# Altium PCB PCB_TIMER_2025-06-27.pcbdoc
Units mm, origin at the board's own origin, x right, y up, seen from the top; angles counter-clockwise.
Board outline 99.44 x 77.72 mm, 2 copper layers (Top Layer, Bottom Layer); 14 components, 21 nets, 56 pads, 4 vias.
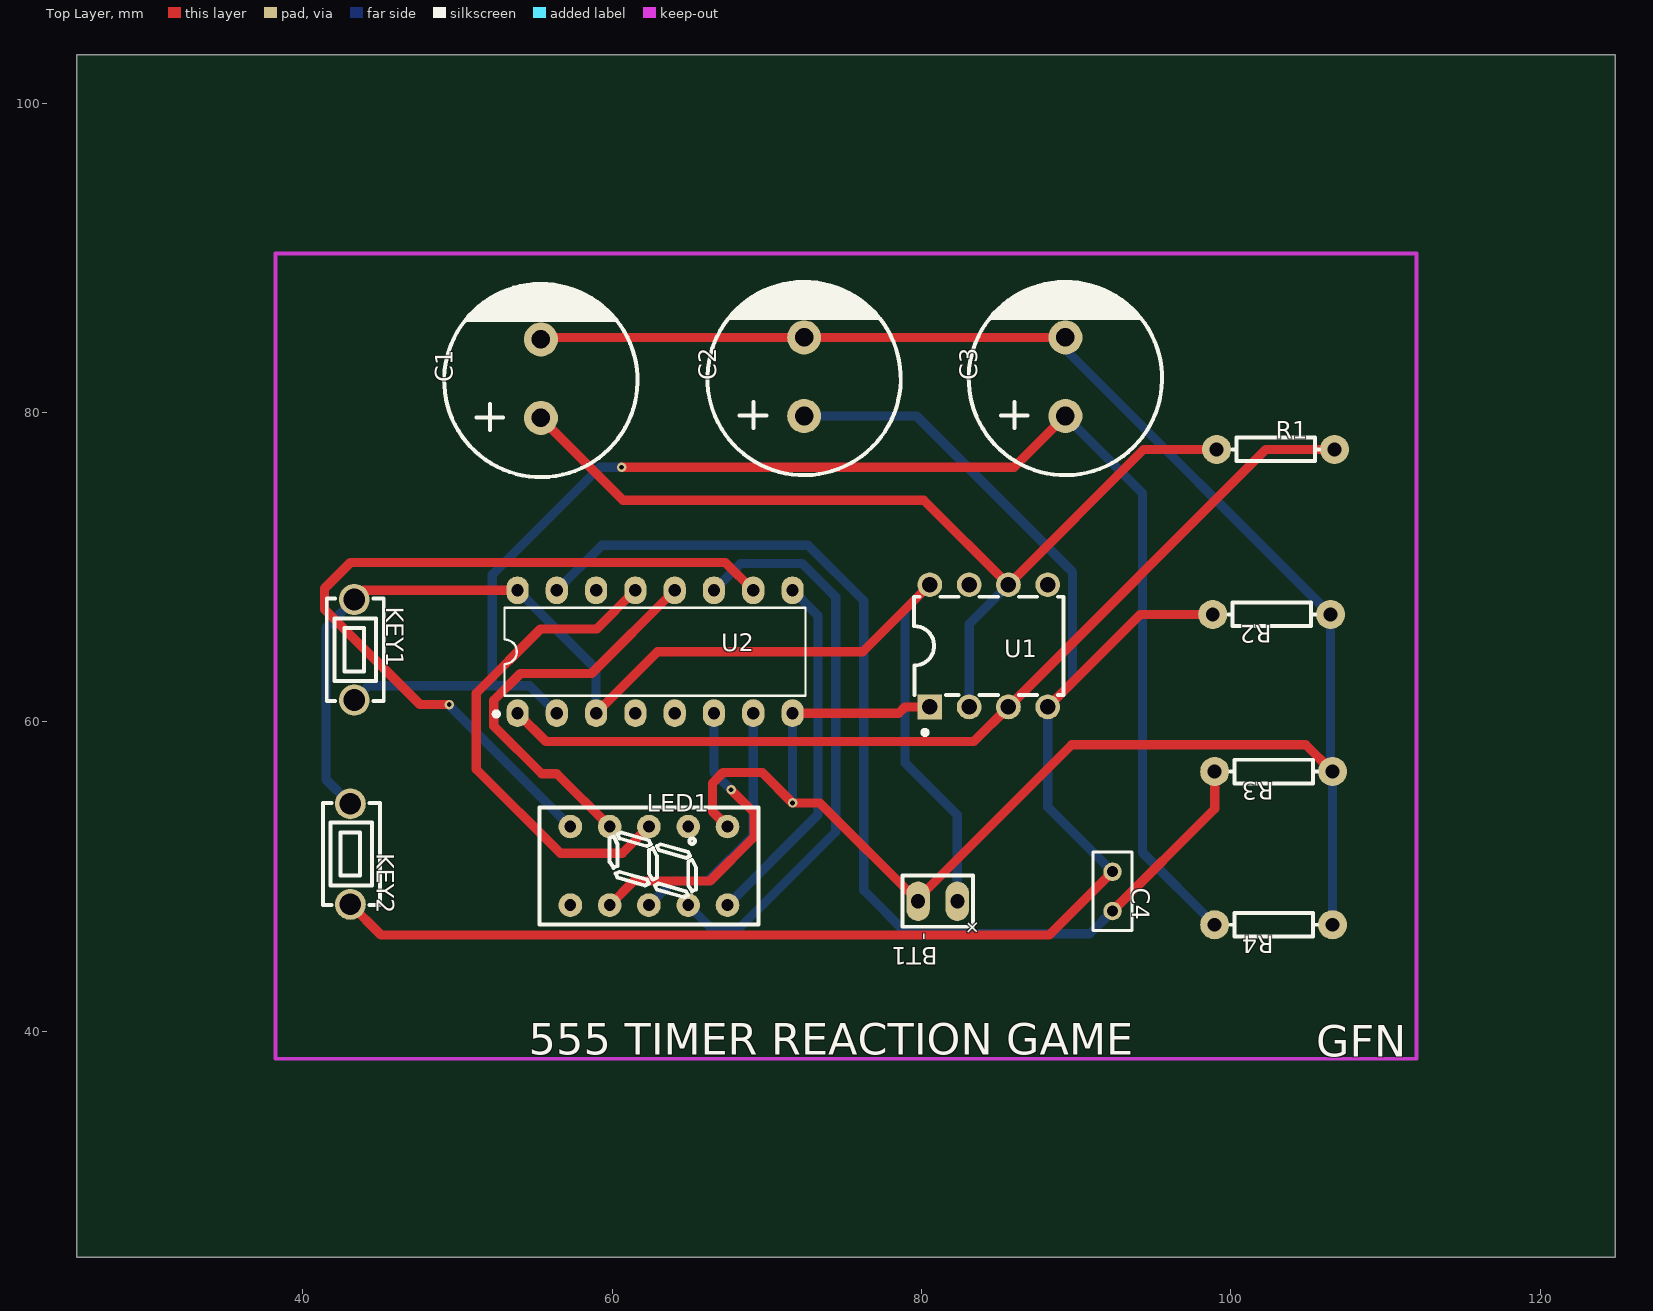
[diagram p0: Top Layer view]
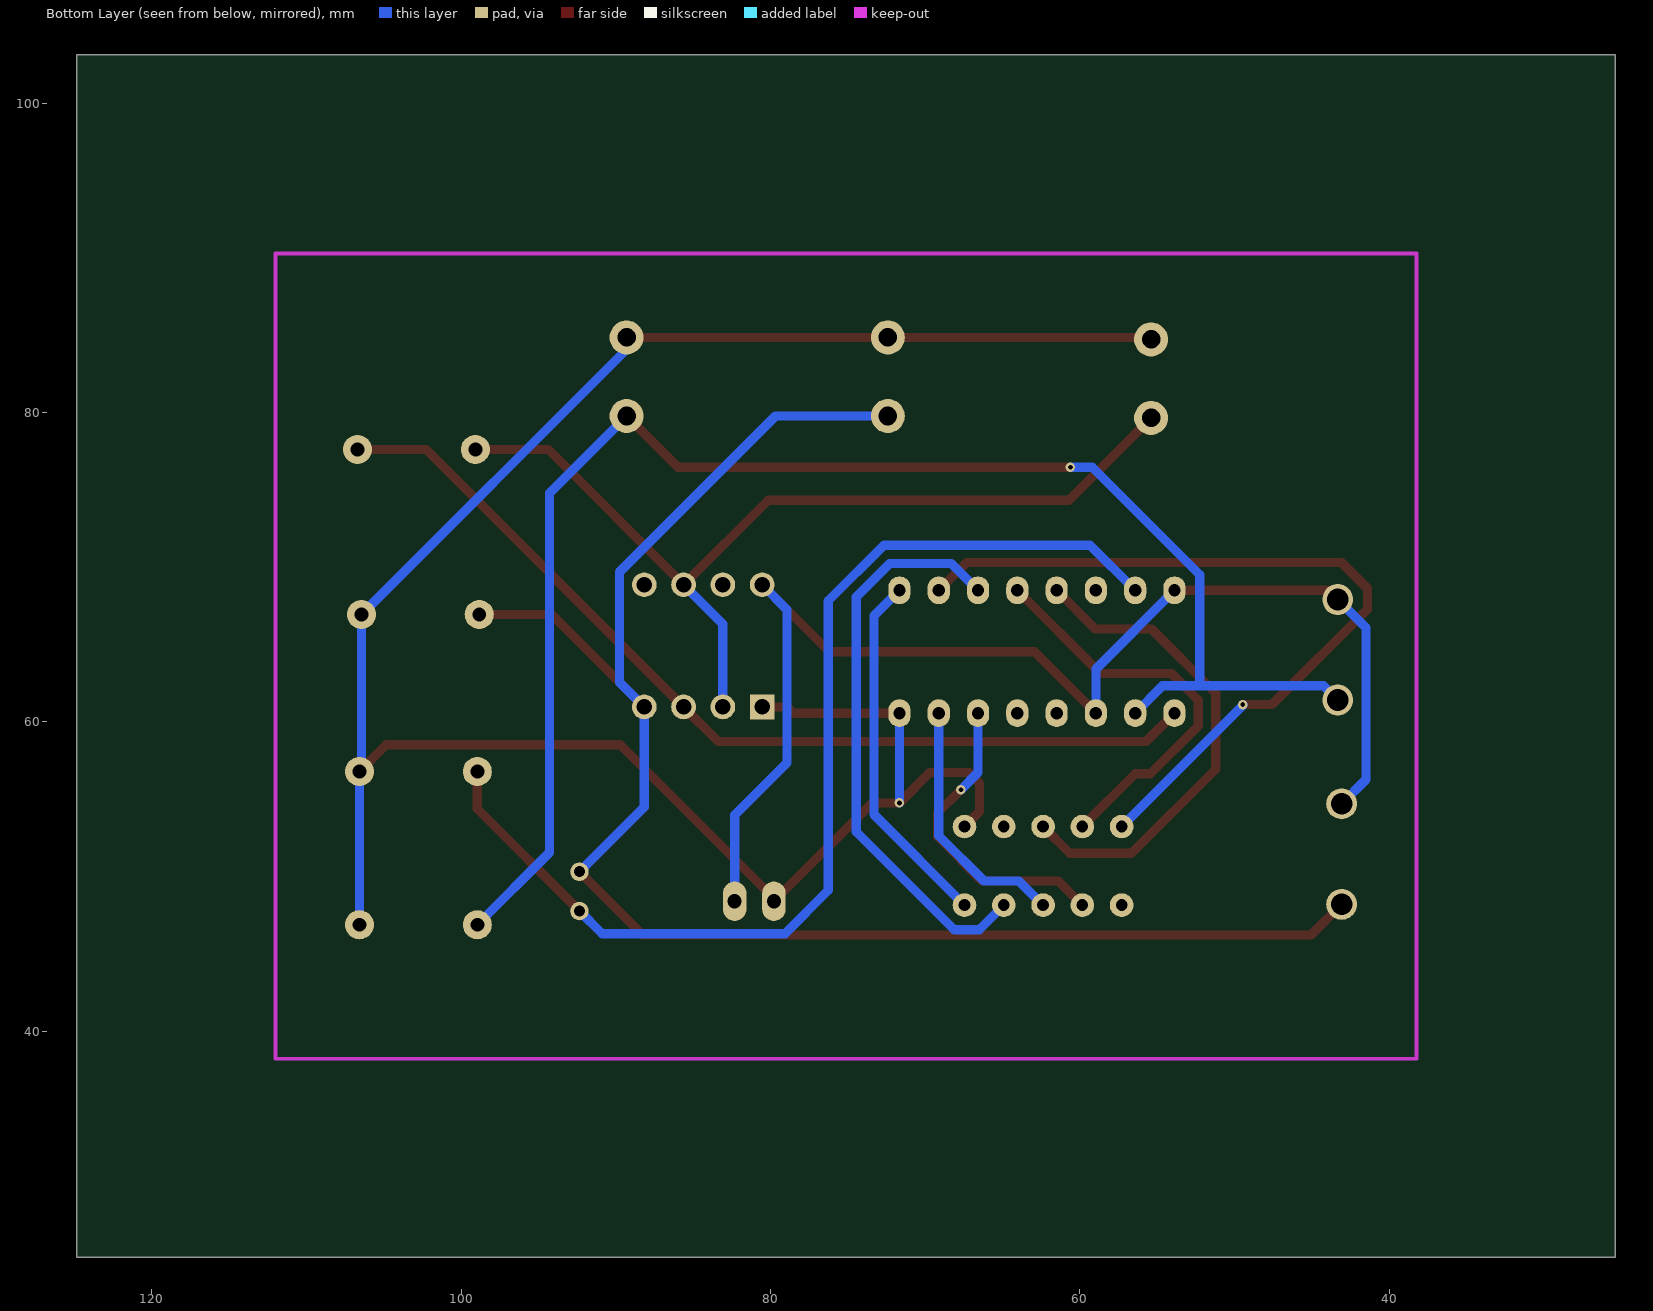
[diagram p1: Bottom Layer view, seen from below]

## Layer stack, top to bottom
Top Layer: signal copper (thickness not stored)
Dielectric: dielectric 0.32, FR-4, Dk 4.8
Bottom Layer: signal copper (thickness not stored)

## Board outline
124.841,25.4 25.4,25.4 25.4,103.124 124.841,103.124

## Components (designator, comment, footprint, x,y, rotation, side; value= is the part's Value field where it differs from the comment)
BT1 "9V" BAT-TH_2P-9VBATTERY 81.049,48.412 r180 top
C1 "1u" CAP-D12.5-F5.0 55.395,82.194 r90 top
C2 "1u" CAP-D12.5-F5.0 72.413,82.321 r90 top
C3 "1u" CAP-D12.5-F5.0 89.304,82.321 r90 top
C4 "1u" RAD-0.1 92.352,49.047 r270 top
KEY1 "K2-3.6×6.1_SMD" KEY-TH_L6.0-W3.5-P6.50 43.33,64.668 r270 top
KEY2 "K2-3.6×6.1_SMD" KEY-TH_L6.0-W3.5-P6.50 43.076,51.46 r270 top
LED1 "FJ3161BH" LED-SEG-TH_FJ3161BH 62.38,50.698 r0 top
R1 "1k" R_AXIAL-0.3 102.893,77.622 r0 top
R2 "1k" R_AXIAL-0.3 102.639,66.954 r180 top
R3 "1k" R_AXIAL-0.3 102.766,56.794 r180 top
R4 "1k" R_AXIAL-0.3 102.766,46.888 r180 top
U1 "NE555" PDIP-8_L9.6-W6.4-P2.54-LS7.9-BL-1 84.351,64.922 r0 top
U2 "CD4026" PDIP-16_L19.3-W6.4-P2.54-LS7.94-BL 62.774,64.541 r0 top

## Footprints (in the part's own frame and the unit in brackets; to place one, negate y for a bottom-side part, rotate by r counter-clockwise, add the part's x,y. Pads: shape width x height; smd on the part's side, far side on the other; paste and mask are expansions set on the pad)
BAT-TH_2P-9VBATTERY [mil]
  oval 60x100 hole 36 paste+0 mask+1.97: 1(-50,0) 2(50,0)
  silkscreen extent -90,-65 90,65
CAP-D12.5-F5.0 [mm]
  round 2.2 hole 1.2 paste+0 mask+0.051: 1(-2.54,0) 2(2.54,0)
  silkscreen extent -6.37,-6.25 6.17,6.25
KEY-TH_L6.0-W3.5-P6.50 [mm]
  round 2 hole 1.4 paste+0 mask+0.051: 1(-3.25,0) 2(3.25,0)
  silkscreen extent -3.3,-1.78 3.3,1.91
LED-SEG-TH_FJ3161BH [mil]
  round 60 hole 30 paste+0 mask+2: 1(-200,-100) 2(-100,-100) 3(0,-100) 4(100,-100) 5(200,-100) 6(200,100) 7(100,100) 8(0,100) 9(-100,100) 10(-200,100)
  silkscreen extent -279,-149 279,149
PDIP-8_L9.6-W6.4-P2.54-LS7.9-BL-1 [mil]
  rect 63x63 hole 39.37 paste+0 mask+2: 1(-150,-155.51)
  round 63 hole 39.37 paste+0 mask+2: 2(-50,-155.51) 3(50,-155.51) 4(150,-155.51) 5(150,155.52) 6(50,155.52) 7(-50,155.52) 8(-150,155.52)
  silkscreen extent -190,-226 190,125
PDIP-16_L19.3-W6.4-P2.54-LS7.94-BL [mm]
  oval 1.44x1.8 hole 0.8 paste+0 mask+0.051: 1(-8.89,-3.97) 2(-6.35,-3.97) 3(-3.81,-3.97) 4(-1.27,-3.97) 5(1.27,-3.97) 6(3.81,-3.97) 7(6.35,-3.97) 8(8.89,-3.97) 9(8.89,3.97) 10(6.35,3.97) 11(3.81,3.97) 12(1.27,3.97) 13(-1.27,3.97) 14(-3.81,3.97) 15(-6.35,3.97) 16(-8.89,3.97)
  silkscreen extent -10.41,-4.17 9.73,2.84
R_AXIAL-0.3 [mil]
  round 74 hole 35.4 paste+0 mask+2: 1(-150,0) 2(150,0)
  silkscreen extent -110,-30 110,30
RAD-0.1 [mil]
  round 47 hole 28 paste+0 mask+2: 1(-50,0) 2(50,0)
  silkscreen extent -100,-50 100,50

## Via types
v1: diameter 0.61, hole 0.305, Top Layer to Bottom Layer, tented both sides, 4 vias

## Nets (pads, with @x,y where several pads share a name; then routed paths per layer and width w, separated by ;. In a path a pad name is that pad's centre, name@x,y a point inside that pad or via, vN(x,y) a via of type N, cw(c..) or ccw(c..) an arc to the next point about the centre after c; other vN are vias at no path point)
C4_2: C4.2 R3.2 U2.15 | length 70.9
  Top Layer w0.6: C4.2 98.956,54.381 R3.2
  Bottom Layer w0.6: U2.15 59.347,71.433 72.665,71.433 76.264,67.835 76.264,49.116 79.069,46.312 90.887,46.312 C4.2
KEY1_2: C3.1 KEY1.2 R4.2 U2.2 | length 99.6
  Top Layer w0.6: v1@60.613,76.463 85.986,76.463 C3.1
  Bottom Layer w0.6: KEY1.2 44.245,62.333 52.259,62.333 ; U2.2 54.662,62.333 52.259,62.333 ; v1@60.613,76.463 59.199,76.463 52.259,69.523 52.259,62.333 ; C3.1 94.289,74.796 94.289,51.555 R4.2
  other v1: 60.613,76.463
LED1_1: LED1.1
LED1_7: LED1.7
U1_1: BT1.2 C1.2 C2.2 C3.2 LED1.6 R2.1 R3.1 R4.1 U1.1 U2.8 | length 145.9
  Top Layer w0.6: C1.2 55.522,84.861 C2.2 C3.2 ; LED1.6 66.484,54.214 66.484,56.046 67.171,56.733 69.698,56.733 v1(71.665,54.766) 73.425,54.766 BT1.2@79.689,48.502 ; U2.8 78.539,60.571 78.94,60.972 U1.1 ; BT1.2 BT1.2@79.689,48.502 ; R3.1 104.834,58.536 89.723,58.536 BT1.2@79.689,48.502
  Bottom Layer w0.6: v1(71.665,54.766) U2.8 ; C3.2 89.304,84.099 R2.1 106.449,56.921 R3.1 R4.1
U1_2: C1.1 R1.1 U1.2 U1.6 | length 60.7
  Top Layer w0.6: C1.1 60.708,74.341 80.151,74.341 U1.6 94.371,77.622 R1.1
  Bottom Layer w0.6: U1.2 83.081,66.332 U1.6
U1_3: R1.2 U1.3 U2.1 | length 61.4
  Top Layer w0.6: U2.1 55.725,58.731 83.38,58.731 U1.3 102.271,77.622 R1.2
U1_4: C2.1 C4.1 KEY2.2 R2.2 U1.4 | length 108.2
  Top Layer w0.6: KEY2.2 45.064,46.222 88.257,46.222 C4.1 ; U1.4 94.143,66.954 R2.2
  Bottom Layer w0.6: C2.1 79.673,79.781 89.764,69.69 89.764,62.575 U1.4 88.161,54.508 C4.1
U1_5: U1.5
U1_7: U1.7
U1_8: BT1.1 KEY1.1 KEY2.1 U1.8 U2.3 U2.16 | length 83
  Top Layer w0.6: KEY1.1 43.923,68.511 U2.16 ; U2.3 62.935,64.541 76.21,64.541 U1.8
  Bottom Layer w0.6: KEY2.1 41.5,56.286 41.5,66.088 KEY1.1 ; U2.16 58.965,63.431 U2.3 ; U1.8 78.929,67.26 78.929,57.369 82.319,53.979 BT1.1
U2_4: U2.4
U2_5: U2.5
U2_6: LED1.2 U2.6 | length 20.2
  Top Layer w0.6: LED1.2 61.404,49.722 66.326,49.722 69.19,52.585 69.19,54.127 v1(67.691,55.626)
  Bottom Layer w0.6: U2.6 66.585,56.732 v1(67.691,55.626)
U2_7: LED1.3 U2.7 | length 16.5
  Bottom Layer w0.6: LED1.3 63.944,49.722 66.203,49.722 69.125,52.643 U2.7
U2_9: LED1.5 U2.9 | length 23.5
  Bottom Layer w0.6: LED1.5 73.314,54.011 73.314,66.862 U2.9
U2_10: LED1.10 U2.10 | length 52.3
  Top Layer w0.6: v1(49.479,61.124) 47.576,61.124 41.406,67.295 41.406,68.634 43.085,70.313 67.322,70.313 U2.10
  Bottom Layer w0.6: v1(49.479,61.124) 49.479,61.059 LED1.10
U2_11: LED1.4 U2.11 | length 37.5
  Bottom Layer w0.6: LED1.4 66.51,46.568 68.122,46.568 74.45,52.896 74.45,68.084 72.287,70.247 68.32,70.247 U2.11
U2_12: LED1.9 U2.12 | length 26.5
  Top Layer w0.6: LED1.9 56.425,56.653 55.444,56.653 52.353,59.743 52.353,61.401 54.083,63.131 58.665,63.131 U2.12
U2_13: LED1.8 U2.13 | length 32.1
  Top Layer w0.6: U2.13 59.004,66.011 55.372,66.011 51.217,61.856 51.217,56.945 56.657,51.505 60.647,51.505 LED1.8
U2_14: U2.14

## Silkscreen, mask and mechanical layers (free items; w line width, h text height)
Top Overlay:
  text "555 TIMER REACTION GAME" at 54.61,38.481 h2.03
  text "GFN" at 105.537,38.354 h2.03

## Text inside footprints (layer, text, board x,y; h text height)
BT1: Top Overlay "+" at 83.181,46.026 h1 r45; Top Overlay "-" at 79.787,46.38 h1 r270